# Altium PCB 2016_CARTE_PUISSANCE.PCBDOC
Units mil, origin at the board's own origin, x right, y up, seen from the top; angles counter-clockwise.
Board outline 2361.77 x 1182.5 mil, 4 copper layers (1-TOP, 2-PSSCE, 3-GND, 4-BOTTOM); 30 components, 19 nets, 123 pads, 0 vias.
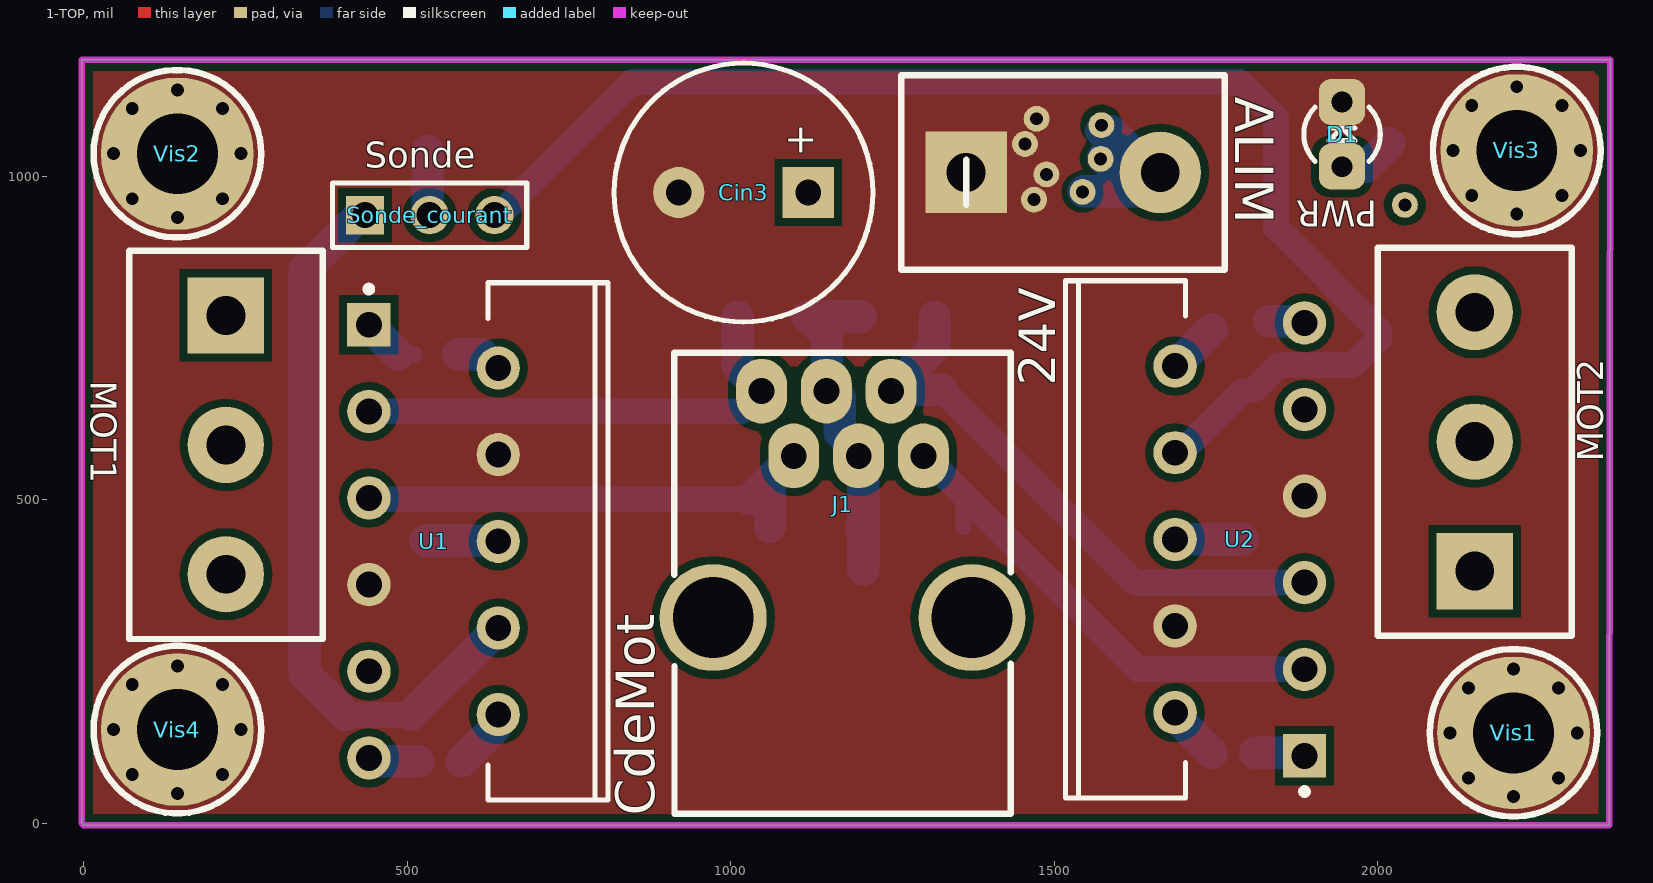
[diagram p0: 1-TOP view]
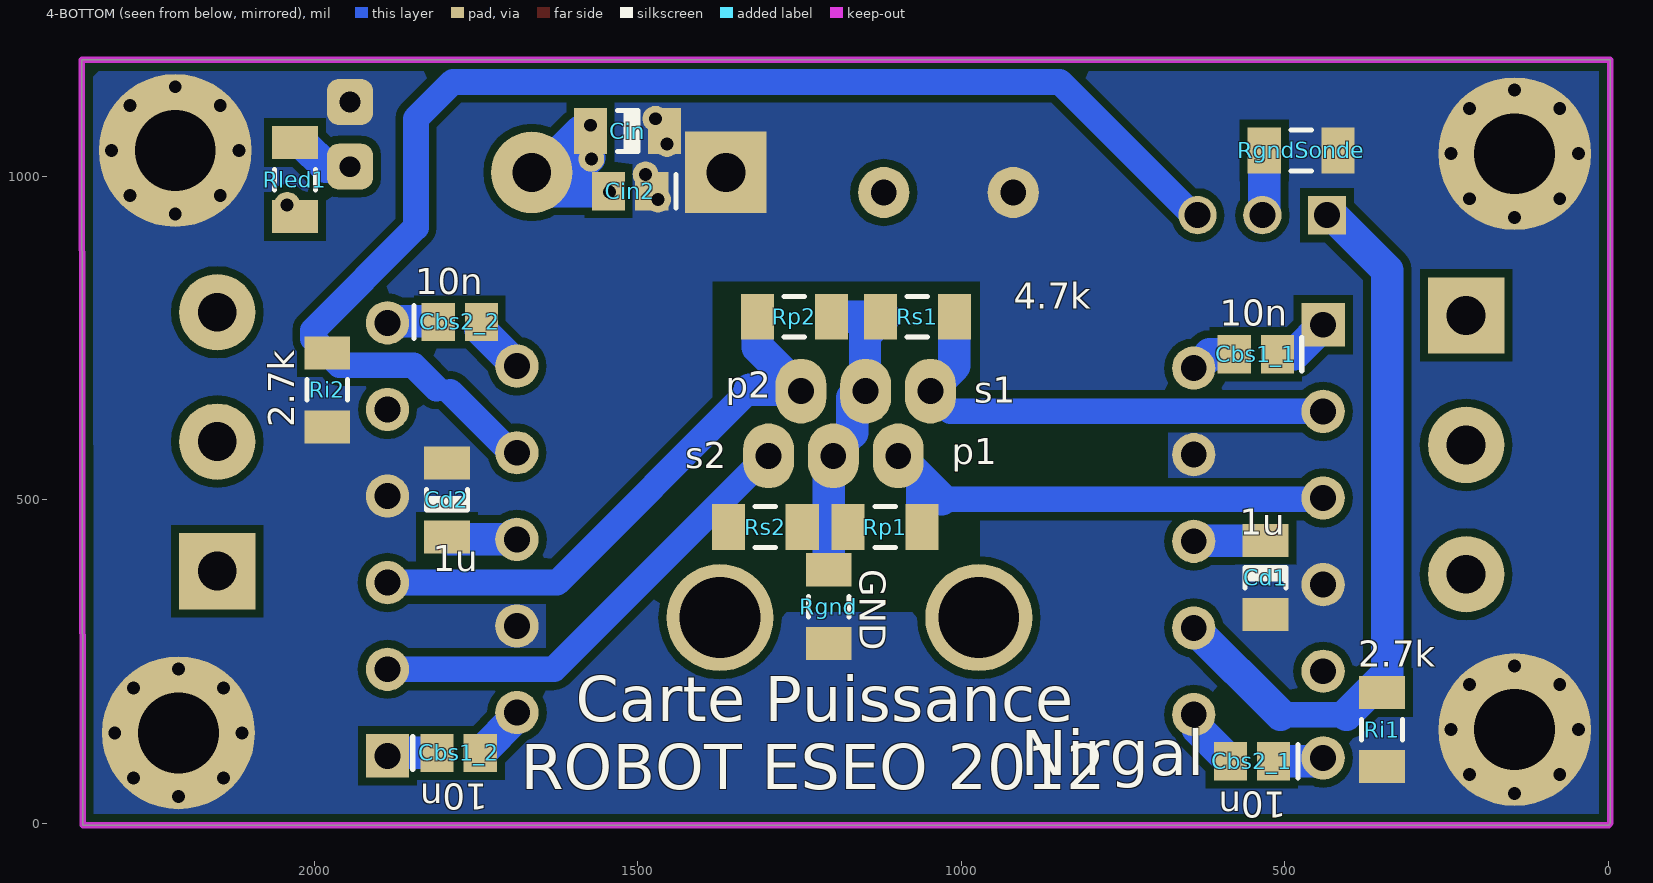
[diagram p1: 4-BOTTOM view, seen from below]
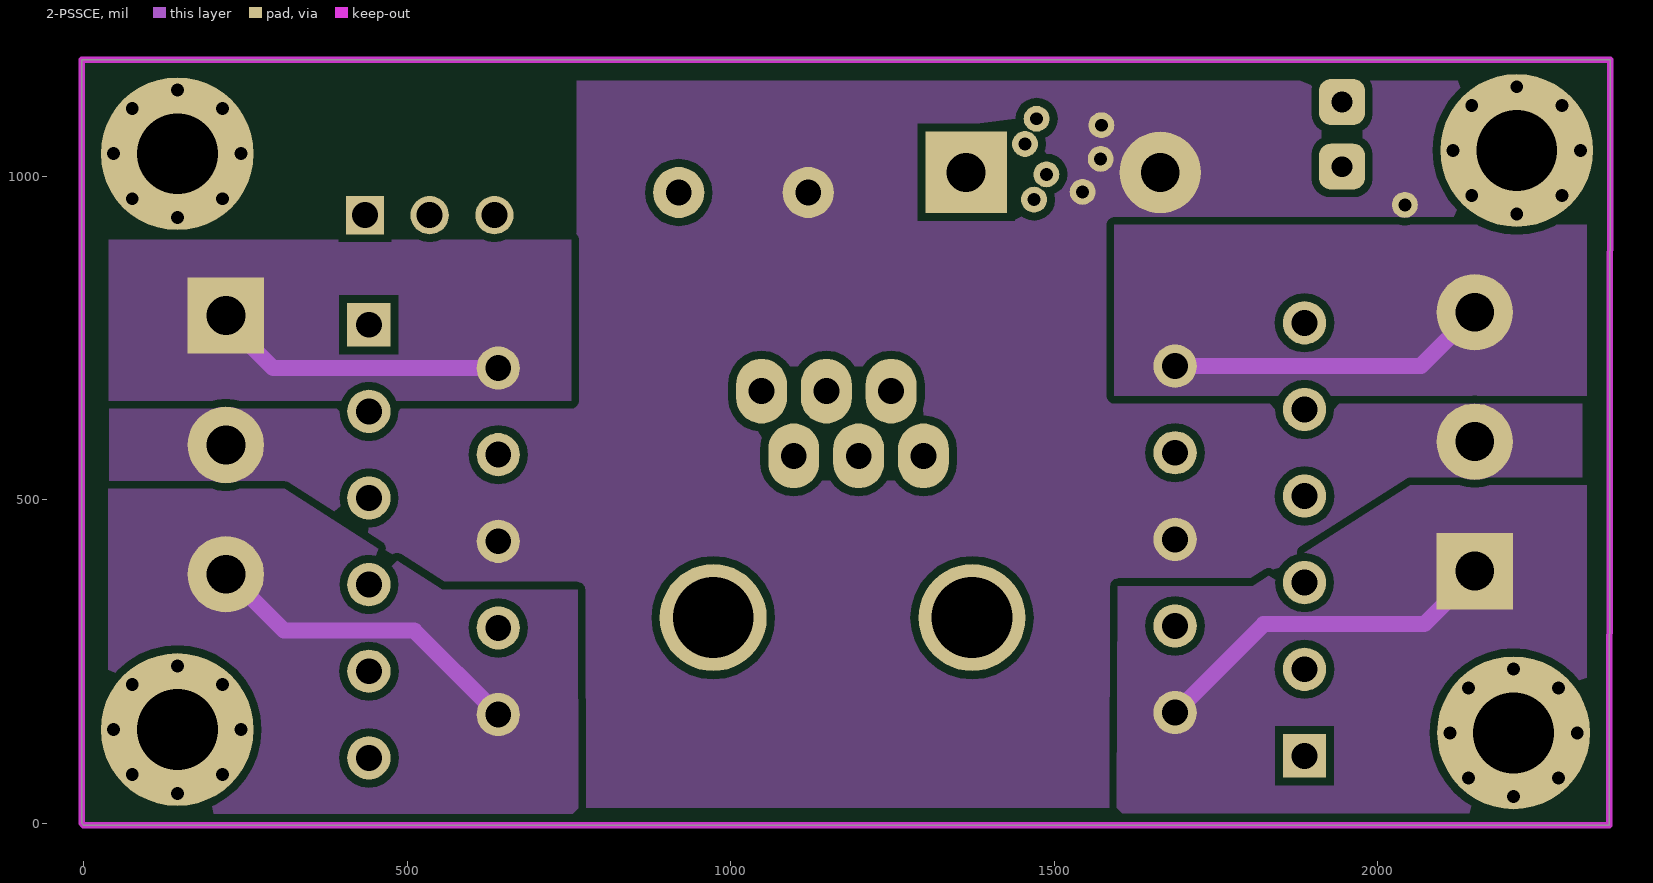
[diagram p2: 2-PSSCE]
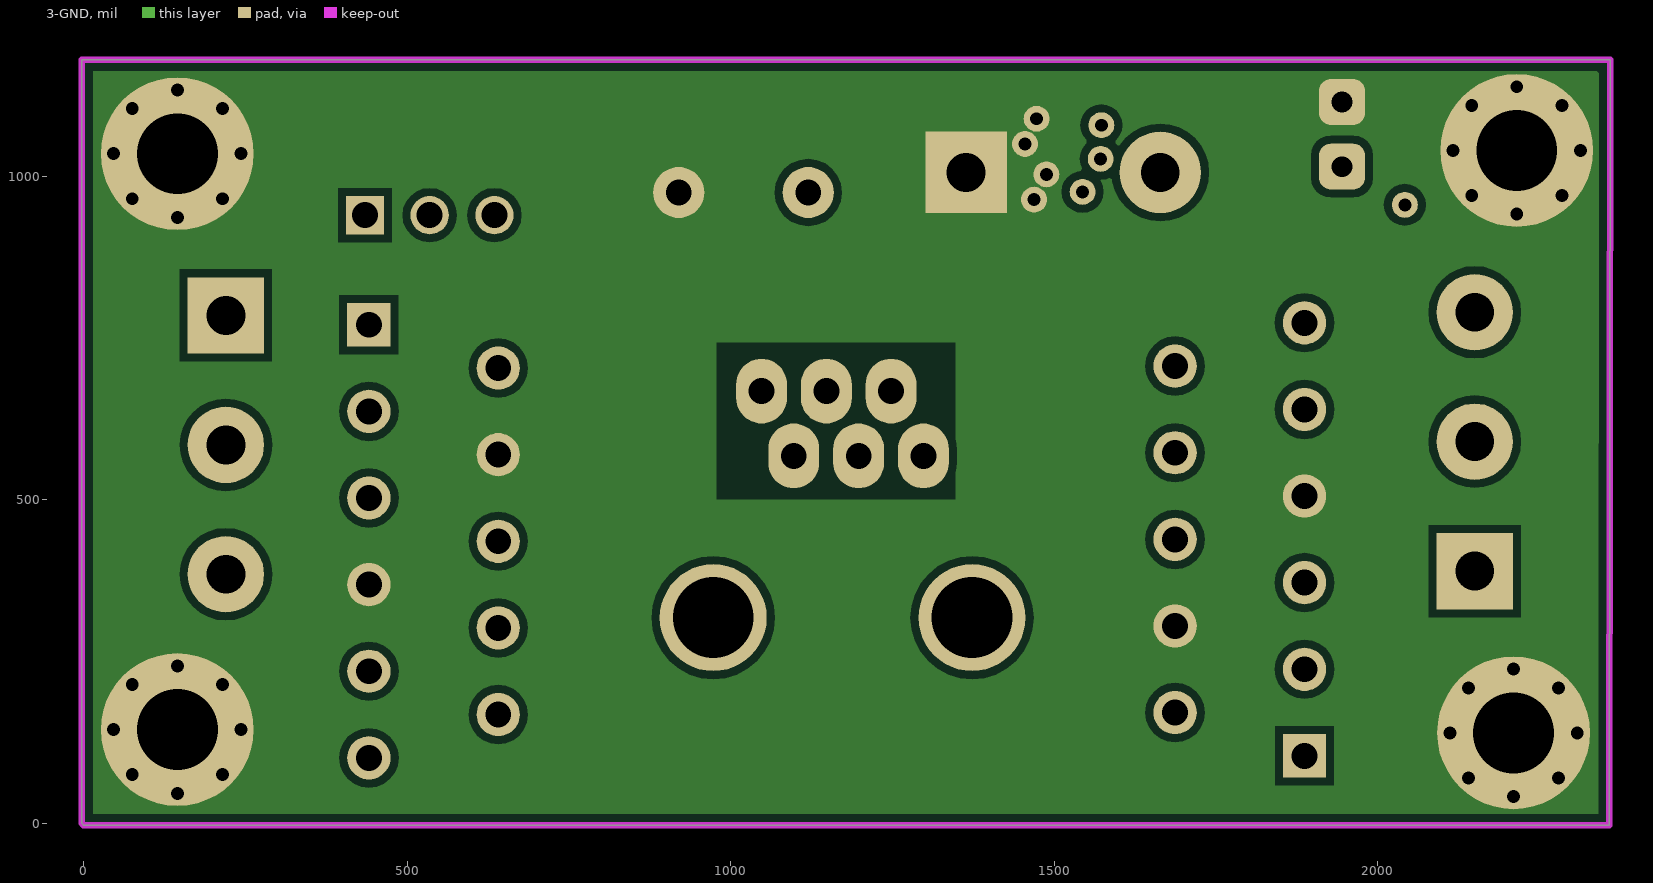
[diagram p3: 3-GND]
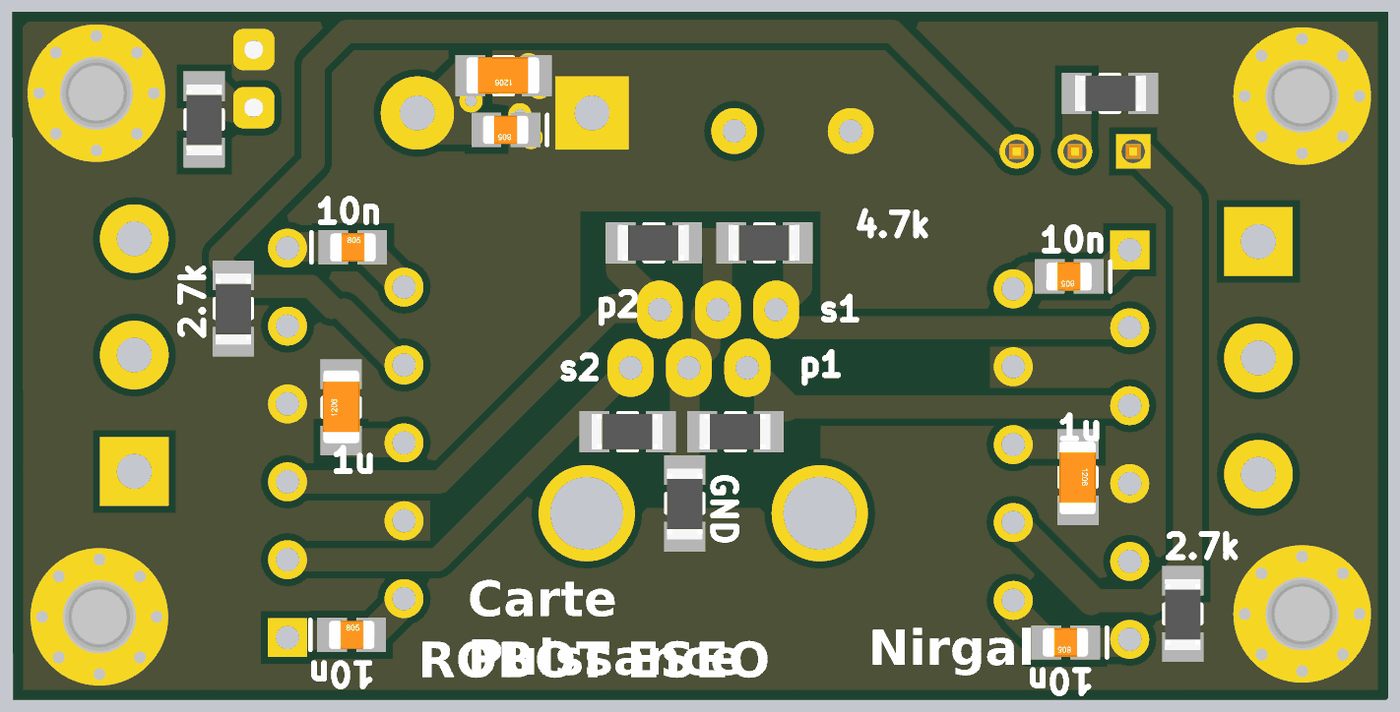
[diagram p4: 3D render of the assembled board from below, using the file's embedded part models]

## Layer stack, top to bottom
1-TOP: signal copper 1.4
Dielectric: prepreg 12.6, FR-4, Dk 4.8
2-PSSCE: signal copper 1.4
Dielectric: core 12.6, FR-4, Dk 4.8
3-GND: signal copper 1.4
Dielectric: prepreg 12.6, FR-4, Dk 4.8
4-BOTTOM: signal copper 1.4

## Board outline
-2.5,0 0,-2.5 2358.15,-2.5 2359.27,1180 -2.5,1180

## Design rules (kind name [scope] priority, off if disabled: settings)
Clearance Clearance_2 [InNamedPolygon('2-MOT1_1') Or  InNamedPolygon('1-GND') Or  InNamedPolygon('3-GND') Or  InNamedPolygon('2-MOT1_2') Or  InNamedPolygon('2-MOT2_1') Or  InNamedPolygon('2-MOT2_2') Or  InNamedPolygon('4-GND') Or  InNamedPolygon('2-24V')] p1: gap=12
Clearance Clearance_1 [InNamedPolygon('2-MOT1_1') Or  InNamedPolygon('2-24V') Or  InNamedPolygon('2-MOT2_1') Or  InNamedPolygon('2-MOT2_2') Or  InNamedPolygon('2-MOT1_2')] p2: gap=12
Clearance [All] p3: gap=7
FabricationTestPointUsage TestPointUsage [All] p1: valid=0 allowmultiple=FALSE
FabricationTestpoint Testpoint [All] p1: side=3 testpointundercomponent=TRUE minsize=40 maxsize=100 preferedsize=60 minholesize=0 maxholesize=40 preferedholesize=32 testpointgrid=1 allowsidetop=TRUE allowsidebottom=TRUE usegrid=TRUE gridtolerance=0.01
PlaneClearance [All] p1: clearance=10
PlaneConnect [All] p1: planeconnectstyle=Direct reliefexpansion=25 reliefentries=4 reliefconductorwidth=12 reliefairgap=15
PolygonConnect [All] p1: connectstyle=Direct reliefconductorwidth=10 reliefentries=4 polygonreliefangle="90 Angle"
RoomDefinition 2011_CARTE_PUISSANCE [InComponentClass('2011_CARTE_PUISSANCE')] p1: confinementstyle=ConfineIn formatcopy=TRUE lockcomponents=FALSE outline 2842.6,53 4079.6,53 4079.6,433 2842.6,433
RoutingLayers RoutingLayers_1 [All] p1: top layer_v5=TRUE mid layer 1_v5=FALSE mid layer 2_v5=FALSE bottom layer_v5=TRUE
RoutingLayers [All] p2: top layer_v5=TRUE mid layer 1_v5=FALSE mid layer 2_v5=FALSE bottom layer_v5=TRUE
RoutingVias [All] p1: holewidth=28 width=50 viastyle="Through Hole" minholewidth=28 minwidth=50 maxholewidth=28 maxwidth=50
SilkscreenOverComponentPads [All] p1: minsilkscreentomaskgap=10
SolderMaskExpansion [All] p1: expansion=0
Width [All] p1: maxlimit=150 minlimit=10 preferedwidth=15
22 further rules are at their usual default settings.

## Components (designator, comment, footprint, x,y, rotation, side; value= is the part's Value field where it differs from the comment)
ALIM "BORNIER2" BORNIER2 1464,1006 r0 top
Cbs1_1 "10nF" C0805_N 545,725 r0 bottom
Cbs1_2 "10nF" C0805_N 1777,109 r180 bottom
Cbs2_1 "10nF" C0805_N 551,96 r0 bottom
Cbs2_2 "10nF" C0805_N 1775,775 r180 bottom
Cd1 "1uF" C1206_N 530,380 r270 bottom
Cd2 "1uF" C1206_N 1795,500 r90 bottom
Cin "10uF" C1206_N 1516,1070 r0 bottom
Cin2 "10nF" C0805_N 1512,977 r0 bottom
Cin3 "Cin3" COND_POL_RAD_5.08B 1120,975 r180 top
D1 "LED" LED_3mm 1945,1065 r0 top
J1 "CdeMot" RJ11_6/6 1248,668 r270 top
MOT1 "BORNIER3" BORNIER3 220,785 r270 top
MOT2 "BORNIER3" BORNIER3 2150,390 r90 top
Rgnd "100" R1206_N 1205,335 r270 bottom
RgndSonde "100" R1206_N 475,1040 r180 bottom
Ri1 "2.7k_1%" R1206_N 350,145 r270 bottom
Ri2 "2.7k_1%" R1206_N 1980,670 r270 bottom
Rled1 "4,7k" R1206_N 2030,995 r270 bottom
Rp1 "10k" R1206_N 1118,458 r0 bottom
Rp2 "10k" R1206_N 1258,783 r0 bottom
Rs1 "10k" R1206_N 1068,783 r0 bottom
Rs2 "10k" R1206_N 1303,458 r0 bottom
Sonde_courant "Header 3" HDR1X3 435,940 r0 top
U1 "LMD18200T" TA11B 541,436 r270 top
U2 "LMD18200T" TA11B 1787,439 r90 top
Vis1 "Pad_M3" M3x6mm 2210,140 r0 top
Vis2 "Pad_M3" M3x6mm 145,1035 r0 top
Vis3 "Pad_M3" M3x6mm 2215,1040 r0 top
Vis4 "Pad_M3" M3x6mm 145,145 r0 top

## Footprints (in the part's own frame and the unit in brackets; to place one, negate y for a bottom-side part, rotate by r counter-clockwise, add the part's x,y. Pads: shape width x height; smd on the part's side, far side on the other; paste and mask are expansions set on the pad)
BORNIER2 [mm] "Connector; Header; 2 Position; screw terminal blocks, Pin Spacing=5.08mm"
  rect 3.2x3.2 hole 1.524: 1(-2.54,0)
  round 3.2 hole 1.524: 2(5.08,0)
  silkscreen extent -5.08,-3.81 7.62,3.81, body extent -2.67,-3.94 7.75,3.94, height 10
BORNIER3 [mm] "Connector; Header; 3 Position; screw terminal blocks, Pin Spacing=5.08mm"
  rect 3x3 hole 1.524: 1(0,0)
  round 3 hole 1.524: 2(5.08,0) 3(10.16,0)
  silkscreen extent -2.54,-3.8 12.7,3.8
C0805_N [mm] "Chip Capacitor, Body 2.0x1.3mm, IPC Medium Density"
  rect 1.3x1.5 smd: 1(-0.85,0) 2(0.85,0)
  silkscreen extent -1.8,-0.65 -1.8,0.65, body extent -0.99,-0.63 1.01,0.63, height 0.8
C1206_N [mm] "Chip Capacitor, Body 3.2x1.6mm, IPC Medium Density"
  rect 1.3x1.8 smd: 1(-1.45,0) 2(1.45,0)
  silkscreen extent -0.4,-0.8 0.4,0.8, body extent -1.57,-0.81 1.63,0.79, height 1.02
COND_POL_RAD_5.08B [mil] "Capacitor; Polarized; Radial; 10.16mm x 5.08mm"
  rect 79x79 / inner round 79 / far side round 79 hole 40: 1(0,0)
  round 79 hole 40: 2(200,0)
  silkscreen extent -100,-200 300,200
HDR1X3 [mm]
  rect 1.5x1.5 hole 1.016: 1(0,0)
  round 1.5 hole 1.016: 2(2.54,0) 3(5.08,0)
  silkscreen extent -1.27,-1.27 6.35,1.27, body extent -1.27,-1.27 6.35,1.27, height 10.1
LED_3mm [mm] "LED 3mm; 2 Leads"
  rrect50% 1.8x1.8 hole 0.813: 1(0,-1.27) 2(0,1.27)
  silkscreen extent -1.5,-1.06 1.5,1.06, body extent -1.64,-1.65 1.65,1.65, height 5.51
M3x6mm [mm] "Vis M3 X 6mm _TORX_Tête 6mm"
  round 0.8 hole 0.508: 1(-2.5,0) 1(-1.768,-1.768) 1(-1.768,1.768) 1(0,-2.5) 1(0,2.5) 1(1.768,-1.768) 1(1.768,1.768) 1(2.5,0)
  round 6 hole 3.175: 1(0,0)
  silkscreen extent -3.29,-3.28 3.29,3.28, body extent -2.84,-2.85 2.86,2.85, height 1.67
R1206_N [mm] "Chip Resistor, Body 3.2x1.6mm, IPC Medium Density"
  rect 1.3x1.8 smd: 1(-1.45,0) 2(1.45,0)
  silkscreen extent -0.4,-0.8 0.4,0.8, body extent -1.68,-0.87 1.68,0.87, height 0.71
RJ11_6/6 [mm] "Connector; RJ11; 6P/6C; Low Profil; Right Angle; Pin Spacing=2.54mm"
  oval 2.54x2 hole 1.016: 1(0,-5.08) 2(2.54,-3.82) 3(0,-2.54) 4(2.54,-1.27) 5(0,0) 6(2.54,1.27)
  round 4.2 hole 3.175: FIX1(8.89,3.18) FIX2(8.89,-6.98)
  silkscreen extent -1.51,-8.51 16.59,4.7
TA11B [mm] "TO, Thru-Hole, Vertical, Heatsink Mounted; 11 Bent Staggered Leads; Pitch 1.7 mm"
  rect 1.7x1.7 hole 1.016: 1(-8.5,-2.54)
  round 1.7 hole 1.016: 2(-6.8,2.54) 3(-5.1,-2.54) 4(-3.4,2.54) 5(-1.7,-2.54) 6(0,2.54) 7(1.7,-2.54) 8(3.4,2.54) 9(5.1,-2.54) 10(6.8,2.54) 11(8.5,-2.54)
  silkscreen extent -10.15,-2.66 10.15,6.84, body extent -10.15,2.14 10.15,6.84, height 21

## Part data
ALIM MOT1 MOT2: "Terminal blocks, 2 pins, pitch=5mm"
Cbs1_1 Cbs1_2 Cbs2_1 Cbs2_2 Cd1 Cd2 Cin Cin2: library part Capacitor, "Capacitor"
Cin3: library part CONDENSATEUR_POLARISE, "Polarized Capacitor"
D1: "Typical LED"
J1: library part CONNECTEUR_RJ12
Rgnd RgndSonde Ri1 Ri2 Rled1 Rp1 Rp2 Rs1 Rs2: library part Resistor, "Resistor"
Sonde_courant: "Header, 3-Pin"
U1 U2: "3A, 55V H-Bridge"
Vis1 Vis2 Vis3 Vis4: library part "Vis M3 X 6mm _TORX_Tête 6mm", "Vis M3 X 6mm _TORX_Tête 6mm"

## Free pads (board coordinates)
  round 40 hole 20: 0(1455,1050) 0(1469,964) 0(1473,1089) 0(1488,1003) 0(1544,976) 0(1572,1027) 0(1573,1079) 0(2042,956)

## Nets (pads, with @x,y where several pads share a name; then routed paths per layer and width w, separated by ;. In a path a pad name is that pad's centre, name@x,y a point inside that pad or via, vN(x,y) a via of type N, cw(c..) or ccw(c..) an arc to the next point about the centre after c; other vN are vias at no path point)
24V: ALIM.2 Cd1.1 Cd2.1 Cin2.2 Cin3.1 Cin.2 MOT1.2 MOT2.2 pad.0@1544,976 pad.0@1572,1027 pad.0@1573,1079 pad.0@2042,956 Rled1.2 U1.6 U2.6 | length 549.5
  4-BOTTOM w50: Cd1.1@528,437 638,437 U1.6@639,436 ; Cin2.2 1638,977 1661,1000 1604,1000 pad.0@1575,1029 ; Cin.2 1588,1070 ALIM.2@1656,1002 ; U2.6@1691,446 1698,439 Cd2.1@1792,439
GND: ALIM.1 Cd1.2 Cd2.2 Cin2.1 Cin3.2 Cin.1 D1.2 pad.0@1455,1050 pad.0@1469,964 pad.0@1473,1089 pad.0@1488,1003 Rgnd.2 RgndSonde.2 Ri1.2 Ri2.2 U1.4 U1.7 U2.4 U2.7 Vis1.1 Vis2.1 Vis3.1 Vis4.1
GND_CDE: J1.3 J1.4 Rgnd.1 Rp1.2 Rp2.1 Rs1.2 Rs2.1 | length 501.4
  4-BOTTOM w50: J1.4@1190,583 1169,604 1169,658 1149,678 1149,755 1120,784 1119,783 Rs1.2 Rp2.1 ; J1.4@1193,571 1205,559 1205,453 ; 1202,456 1205,453 ; Rgnd.1 1205,453
I_SONDE_1: Ri1.1 Sonde_courant.1 U1.8 | length 1126.3
  4-BOTTOM w40: 405,168 506.86,168
  4-BOTTOM w50: 405,168 342,231 342,855 Sonde_courant.1@428,941 ; 506.86,168 U1.8
I_SONDE_2: Ri2.1 Sonde_courant.3 U2.8 | length 2065.4
  4-BOTTOM w40: Sonde_courant.3@640.5,938.5 848,1146 1786,1146 1843,1089 1843,921 2002,762 2002,749 1961,708 1847,708 1811,672 ; U2.8@1701.91,579 1790,667.09
MOT1_1: Cbs1_1.2 MOT1.1 U1.2 | length 554.3
  2-PSSCE w25: MOT1.1@213,784 293.28,703.72 U1.2
  4-BOTTOM w25: U1.2@622.28,703.72 U1.2@637.28,703.72 ; U1.2 U1.2@637.28,703.72 ; U1.2@642,699 U1.2@637.28,703.72
  4-BOTTOM w50: Cbs1_1.2 616,725 U1.2@637.28,703.72
MOT1_2: Cbs2_1.2 MOT1.3 U1.10 | length 598.3
  2-PSSCE w25: MOT1.3@224,384 310,298 511.28,298 U1.10
  4-BOTTOM w25: U1.10@635,146.54 U1.10@635,167
  4-BOTTOM w50: Cbs2_1.2 U1.10@635,146.54
MOT2_1: Cbs1_2.2 MOT2.1 U2.2 | length 644.6
  2-PSSCE w25: U2.2 1823.72,308 2072,308 MOT2.1@2152,388
  4-BOTTOM w25: U2.2@1686,166.54 U2.2@1686,175
  4-BOTTOM w50: U2.2@1686,166.54 Cbs1_2.2
MOT2_2: Cbs2_2.2 MOT2.3 U2.10 | length 582.3
  2-PSSCE w25: U2.10@1688,707 2067,707 MOT2.3
  4-BOTTOM w25: Cbs2_2.2@1744,764 Cbs2_2.2@1753.54,764
  4-BOTTOM w50: U2.10@1690,710 Cbs2_2.2@1744,764
NetCbs1_1_1: Cbs1_1.1 U1.1 | length 94.8
  4-BOTTOM w25: Cbs1_1.1@486,725 Cbs1_1.1
  4-BOTTOM w50: U1.1@437,774 Cbs1_1.1@486,725
NetCbs1_2_1: Cbs1_2.1 U2.1 | length 73.4
  4-BOTTOM w25: U2.1@1881,109 U2.1@1883,107
  4-BOTTOM w50: Cbs1_2.1 U2.1@1881,109
NetCbs2_1_1: Cbs2_1.1 U1.11 | length 80.2
  4-BOTTOM w25: U1.11@439,100 U1.11@443,96
  4-BOTTOM w50: U1.11@443,96 Cbs2_1.1
NetCbs2_2_1: Cbs2_2.1 U2.11 | length 51.5
  4-BOTTOM w50: Cbs2_2.1@1832.46,776 U2.11@1884,776
NetD1_1: D1.1 Rled1.1 | length 87.9
  4-BOTTOM w50: D1.1 1982,1015 Rled1.1@2018,1051
NetRgndSonde_1: RgndSonde.1 Sonde_courant.2 | length 105.4
  4-BOTTOM w50: RgndSonde.1 532.09,942.91 Sonde_courant.2 Sonde_courant.2@538,937
PWM1: J1.2 Rp1.1 U1.5 | length 806.5
  4-BOTTOM w25: 1060.91,531.91 J1.2@1095,566
  4-BOTTOM w40: U1.5@441,501 1030.61,501
  4-BOTTOM w50: 1030.61,501 J1.2 ; Rp1.1 1060.91,531.91
PWM2: J1.5 Rp2.2 U2.5 | length 908.2
  4-BOTTOM w40: 1327,670 1624.93,372.07 U2.5
  4-BOTTOM w50: J1.5@1244,670 1327,670 ; J1.5@1248,669 1315.09,736.09 Rp2.2
SENS1: J1.1 Rs1.1 U1.3 | length 754
  4-BOTTOM w25: J1.1@1017,637 J1.1
  4-BOTTOM w40: U1.3@438,637 J1.1@1017,637
  4-BOTTOM w50: Rs1.1 1010.91,707.09 J1.1@1050,668
SENS2: J1.6 Rs2.2 U2.3 | length 854.7
  4-BOTTOM w25: J1.6@1303,564 1360.09,506.91 Rs2.2
  4-BOTTOM w40: J1.6@1299,569 1629.79,238.21 U2.3
pads on no net: J1.FIX1 J1.FIX2 U1.9 U2.9

## Polygon pours and split planes (outlines as drawn)
GND on 1-TOP "1-GND" (solid, remove dead copper, pour order 1000): 0,1174 2353,1174 2353,0 0,0
GND on 3-GND "3-GND" (solid, remove dead copper, pour order 1001): 0,1176 2355,1176 2355,0 0,0
MOT1_1 on 2-PSSCE "2-MOT1_1" (solid, remove dead copper, pour order 1002): 39,902 754,902 754,653 39,653
MOT2_2 on 2-PSSCE "2-MOT2_2" (solid, remove dead copper, pour order 1003): 1593,925 2323,925 2323,661 1593,661
24V on 2-PSSCE "2-24V" (solid, remove dead copper, pour order 1006): 40,1148 2316,1148 2316,24 40,24
MOT1_2 on 2-PSSCE "2-MOT1_2" (solid, remove dead copper, pour order 1004): 38,517 310.9,517 553.97,362 763.9,361 765,10 38,10
MOT2_1 on 2-PSSCE "2-MOT2_1" (solid, remove dead copper, pour order 1005): 2323,522.67 2050.52,522.67 1807.83,367.67 1598.23,366.67 1597.12,15.67 2323,15.67
GND on 4-BOTTOM "4-GND" (solid, remove dead copper, pour order 1007): 0,1175 2355,1175 2355,0 0,0

## Keep-outs
Keep-Out Layer:
  the board outline again, w10

## Other copper
2-PSSCE:
  pour cut-out: 593,1149 762,1149 762,912 593,912
3-GND:
  pour cut-out: 1347.5,501 978.5,501 978.5,743 1347.5,743
4-BOTTOM:
  pour cut-out: 681,611 715,611 715,525 681,525
  pour cut-out: 1608,348 1642,348 1642,262 1608,262
  pour cut-out: 972,837 1384,837 1384,327 972,327

## Silkscreen, mask and mechanical layers (free items; w line width, h text height)
Top Overlay:
  text "Sonde" at 435,1013 h40
  text "PWR" at 1999,962 h40 r180
  text "24V" at 1502,676 h56.25 r90
Bottom Overlay:
  text "10n" at 1844,818 h40
  text "4.7k" at 919,795 h40
  text "10n" at 601,769 h40
  text "p2" at 1364,658 h40
  text "s1" at 980,650 h40
  text "2.7k" at 2031,612 h40 r270
  text "p1" at 1015,555 h40
  text "s2" at 1427,549 h40
  text "1u" at 570,446 h40
  text "GND" at 1157,393 h40 r90
  text "1u" at 1817,390 h40
  text "2.7k" at 387,242 h40
  text "Carte Puissance" at 1596,135 h120
  text "10n" at 1732,61 h40 r180
  text "Nirgal" at 908,51 h120
  text "10n" at 498,49 h40 r180
  text "ROBOT ESEO 2012" at 1681,30 h120

## Text inside footprints (layer, text, board x,y; h text height)
Cin3: Top Overlay "+" at 1135,1075 h45 r180